# Altium PCB MagnetometerBreakoutPCB.PcbDoc
Units mil, origin at the board's own origin, x right, y up, seen from the top; angles counter-clockwise.
Board outline 490 x 470 mil, 2 copper layers (Top Layer, Bottom Layer); 5 components, 4 nets, 14 pads, 2 vias.
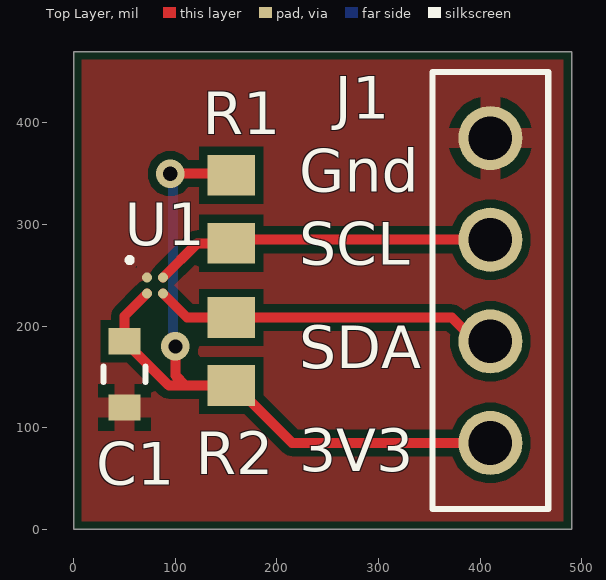
[diagram p0: Top Layer view]
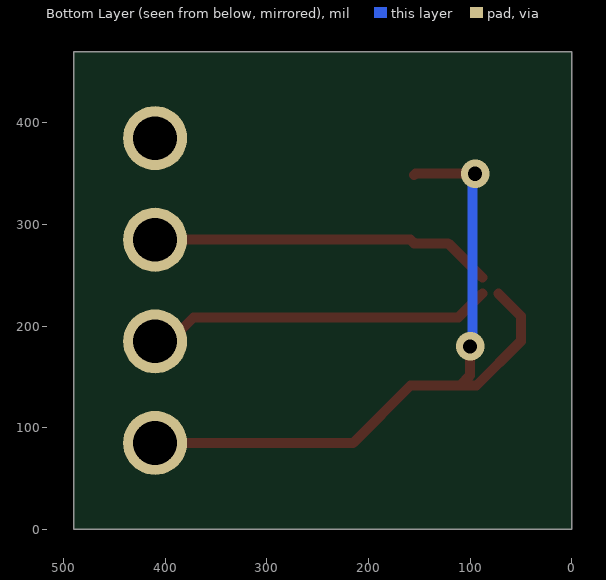
[diagram p1: Bottom Layer view, seen from below]
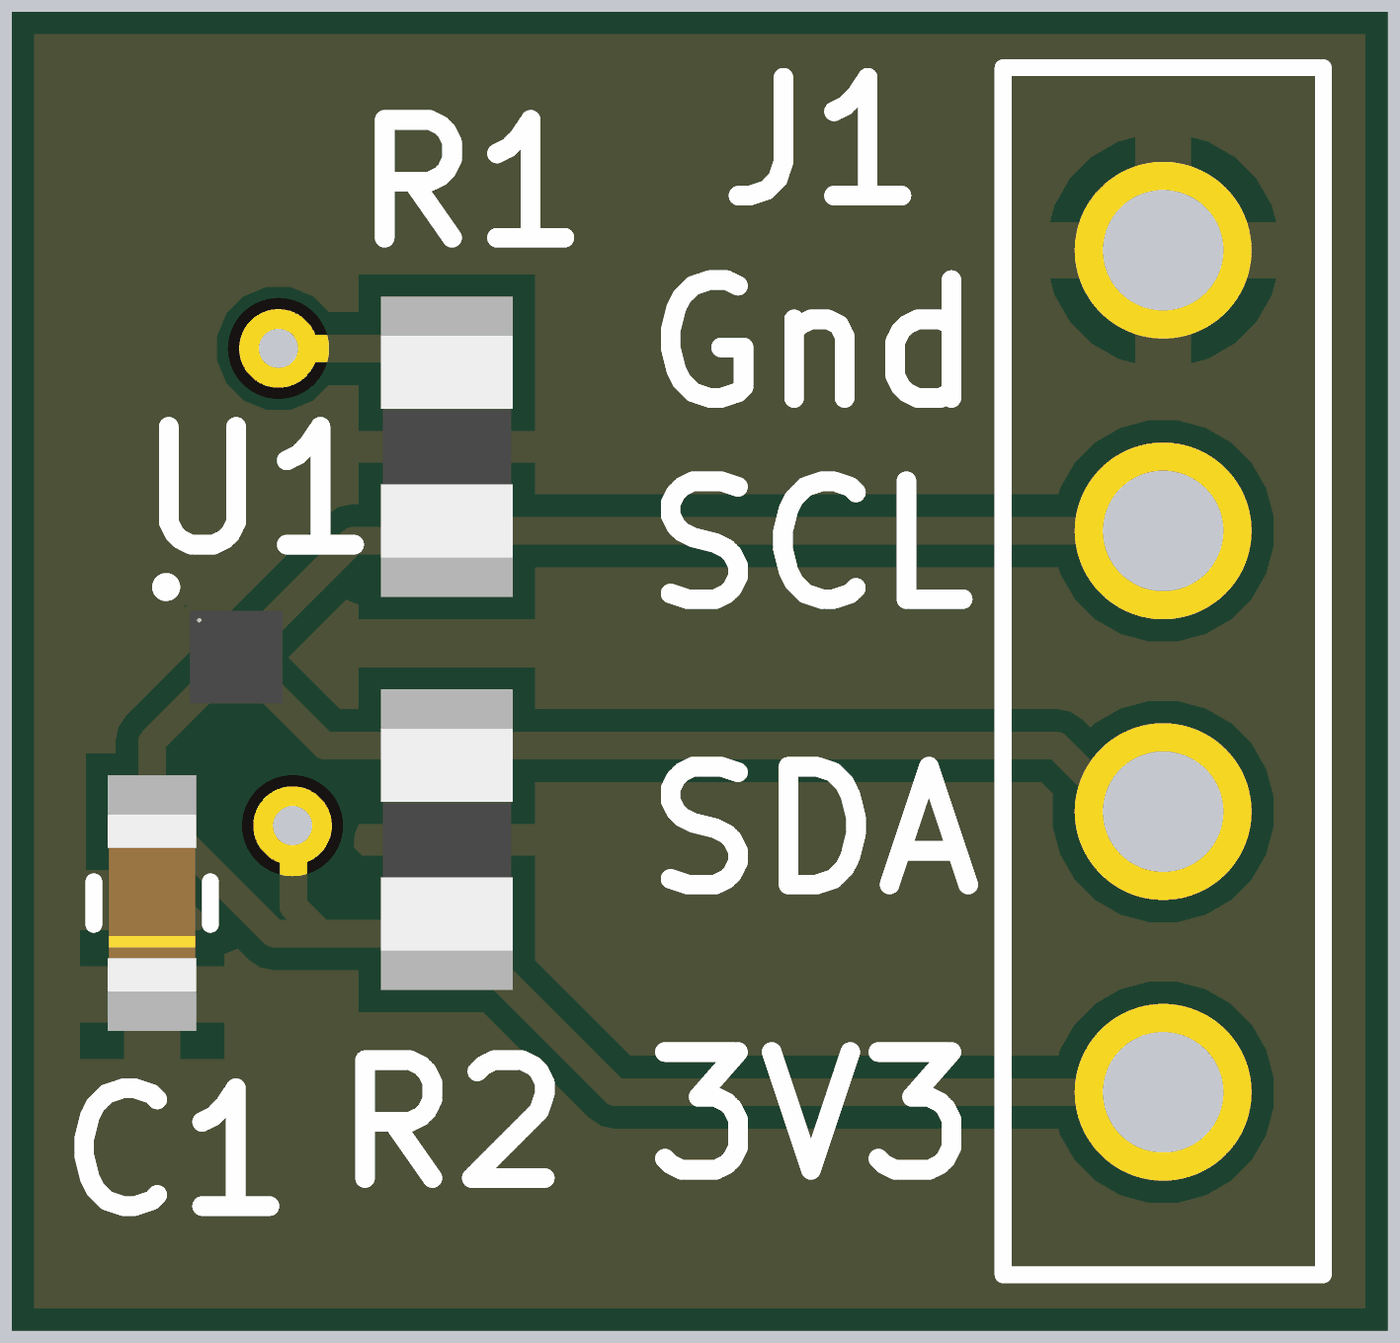
[diagram p2: 3D render of the assembled board from above, using the file's embedded part models]

## Layer stack, top to bottom
Top Solder: solder mask 0.4, Solder Resist, Dk 3.5
Top Layer: signal copper 1.4
Dielectric 1: dielectric 12.6, FR-4, Dk 4.8
Bottom Layer: signal copper 1.4
Bottom Solder: solder mask 0.4, Solder Resist, Dk 3.5

## Board outline
0,0 490,0 490,470 0,470

## Design rules (kind name [scope] priority, off if disabled: settings)
BoardOutlineClearance [All] p1: gap=7.87 ignorepadtopadclearanceinfootprint=FALSE except(15.75: Arc-SplitBarrior Arc-SplitContinuation Track-SplitBarrior Track-SplitContinuation SMDPad-SplitBarrior SMDPad-SplitContinuation THPad-SplitBarrior THPad-SplitContinuation Via-SplitBarrior Via-SplitContinuation Fill-SplitBarrior Fill-SplitContinuation Poly-SplitBarrior Poly-SplitContinuation Region-SplitBarrior Region-SplitContinuation Text-SplitBarrior Text-SplitContinuation)
Clearance [All] p1: gap=7.87 ignorepadtopadclearanceinfootprint=FALSE except(3.5: Arc-Arc Arc-Track Arc-SMDPad Track-Track Track-SMDPad SMDPad-SMDPad; 5: Arc-Via Track-Via SMDPad-Via THPad-Via Via-Via; 10: Arc-Text Track-Text SMDPad-Text THPad-Text Via-Text Fill-Text Poly-Text Region-Text Text-Text)
HoleSize [All] p1: absolutevalues=TRUE maxlimit=248.03 minlimit=7.87 maxpercent=80.000 minpercent=20.000
MinimumAnnularRing [All] p1: minimumring=3
MinimumSolderMaskSliver [All] p1: minsoldermaskwidth=3.94
PolygonConnect PolygonConnect_1 [All] p1: thpad.connectstyle=Relief thpad.reliefconductorwidth=20 thpad.reliefentries=4 thpad.polygonreliefangle="90 Angle" thpad.airgapwidth=10 smdpad.connectstyle=Relief smdpad.reliefconductorwidth=20 smdpad.reliefentries=4 smdpad.polygonreliefangle="90 Angle" smdpad.airgapwidth=10 via.connectstyle=Direct via.reliefconductorwidth=20 via.reliefentries=4 via.polygonreliefangle="90 Angle" via.airgapwidth=10
RoutingCorners [All] p1: cornerstyle=Round minsetback=100 maxsetback=100
RoutingVias [All] p1: holewidth=19.68 width=39.37 viastyle="Through Hole" minholewidth=7.87 minwidth=17.72 maxholewidth=39.37 maxwidth=78.74
SilkToSilkClearance [All] p1: silktosilkclearance=3.94
SilkToSolderMaskClearance [IsPad] p1: minsilkscreentomaskgap=3.94 clearancetoexposedcopper=TRUE
SolderMaskExpansion [All] p1: expansion=4 istentingtop=FALSE
Width [All] p1: maxlimit=100 minlimit=3.5 preferedwidth=15
25 further rules are at their usual default settings.

## Components (designator, comment, footprint, x,y, rotation, side; value= is the part's Value field where it differs from the comment)
C1 "CL10A225KP8NNNC" "CAP 0603" 50,152.41 r90 top value="2.2 uF"
J1 "Header 0.1\" 4P" "0.1\" Header 4P" 410,235 r90 top
R1 "RC0805JR-072K7L" "RES 0805" 155,315 r90 top value=2.7k
R2 "RC0805JR-072K7L" "RES 0805" 155,175 r90 top value=2.7k
U1 "MMC5603NJ" 4-WLP 80,240 r0 top

## Footprints (in the part's own frame and the unit in brackets; to place one, negate y for a bottom-side part, rotate by r counter-clockwise, add the part's x,y. Pads: shape width x height; smd on the part's side, far side on the other; paste and mask are expansions set on the pad)
"0.1\" Header 4P" [mil]
  round 63 hole 43 mask+0: 1(-150,0) 2(-50,0) 3(50,0) 4(150,0)
  silkscreen extent -215,-57 215,57
4-WLP [mm]
  round 0.25 smd paste+0 mask+0: A1(-0.2,0.2) A2(0.2,0.2) B1(-0.2,-0.2) B2(0.2,-0.2)
  silkscreen extent -0.7,0.57 -0.57,0.7, body extent -0.42,-0.42 0.42,0.42, height 0.61
"CAP 0603" [mm]
  rect 0.656x0.8 smd paste+0 mask+0: 1(-0.828,0) 2(0.828,0)
  silkscreen extent -0.19,-0.53 0.19,0.53, body extent -0.8,-0.4 0.8,0.4, height 0.9
"RES 0805" [mil]
  rect 40x47 smd paste+0 mask+0: 1(-33.5,0) 2(33.5,0)
  body extent -39,-24 39,24, height 28

## Part data
C1: "CAP CER 2.2UF 10V X5R 0603", Mfr_Name=Samsung, Copyright="Copyright (C) 2022 Ultra Librarian. All rights reserved.", Digi-Key_Part_Number_1=1276-1085-2-ND, Digi-Key_Part_Number_2=1276-1085-1-ND, Digi-Key_Part_Number_3=1276-1085-6-ND, Manufacturer_Part_Number=CL10A225KP8NNNC, RefDes=RefDes, Type=DEV
J1: "CONN SIL HDR MALE PIN"
R1 R2: "No Description Available", Mfr_Name=Yageo, Copyright="Copyright (C) 2022 Ultra Librarian. All rights reserved.", Digi-Key_Part_Number_1=311-2.7KARCT-ND, Digi-Key_Part_Number_2=311-2.7KARDKR-ND, Digi-Key_Part_Number_3=311-2.7KARTR-ND, Manufacturer_Part_Number=RC0805JR-072K7L, RefDes=RefDes, Type=DEV
U1: "3-AXIS AMR MAGNETIC SENSOR", Supplier Part Number 1=1267-MMC5603NJCT-ND, Supplier 1=Digi-Key, Supplier 2=Digi-Key, Supplier 3=Digi-Key, Supplier 4=Mouser, Supplier Part Number 2=1267-MMC5603NJDKR-ND, Supplier Part Number 3=1267-MMC5603NJTR-ND, Supplier Part Number 4=438-MMC5603NJ

## Via types
v1: diameter 28, hole 14, Top Layer to Bottom Layer, 2 vias

## Nets (pads, with @x,y where several pads share a name; then routed paths per layer and width w, separated by ;. In a path a pad name is that pad's centre, name@x,y a point inside that pad or via, vN(x,y) a via of type N, cw(c..) or ccw(c..) an arc to the next point about the centre after c; other vN are vias at no path point)
3V3: C1.2 J1.1 R1.2 R2.1 U1.B1 | length 733
  Top Layer w9.84: U1.B1 50,210 C1.2 93.5,141.5 110,141.5 ; v1(95,350) 153.5,350 R1.2 ; v1(100,180) 100.26,179.74 100.26,151.24 110,141.5 ; J1.1 215,85 158.5,141.5 R2.1 110,141.5
  Bottom Layer w9.84: v1(95,350) 97.5,347.5 97.5,182.5 v1(100,180)
Gnd: C1.1 J1.4 U1.A1
scl: J1.3 R1.1 U1.A2 | length 337.5
  Top Layer w9.84: U1.A2 121.5,281.5 R1.1 158.5,285 J1.3
sda: J1.2 R2.2 U1.B2 | length 341.6
  Top Layer w9.84: U1.B2 111.5,208.5 R2.2 372.12,208.5 395.62,185 J1.2

## Polygon pours and split planes (outlines as drawn)
Gnd on Top Layer "GND_L01_P001" (solid, remove dead copper, pour order 1): -95,-65 535,-65 535,575 -95,575

## Silkscreen, mask and mechanical layers (free items; w line width, h text height)
Top Overlay:
  text "Gnd" at 222,332 h42
  text "SCL" at 222,260.33 h42
  text "SDA" at 222,158.67 h42
  text "3V3" at 222,57 h42